# Altium PCB cameraTri-v1_1.PcbDoc
Units mil, origin at the board's own origin, x right, y up, seen from the top; angles counter-clockwise.
Board outline 1540 x 1715 mil, 2 copper layers (Top Layer, Bottom Layer); 49 components, 43 nets, 202 pads, 26 vias.
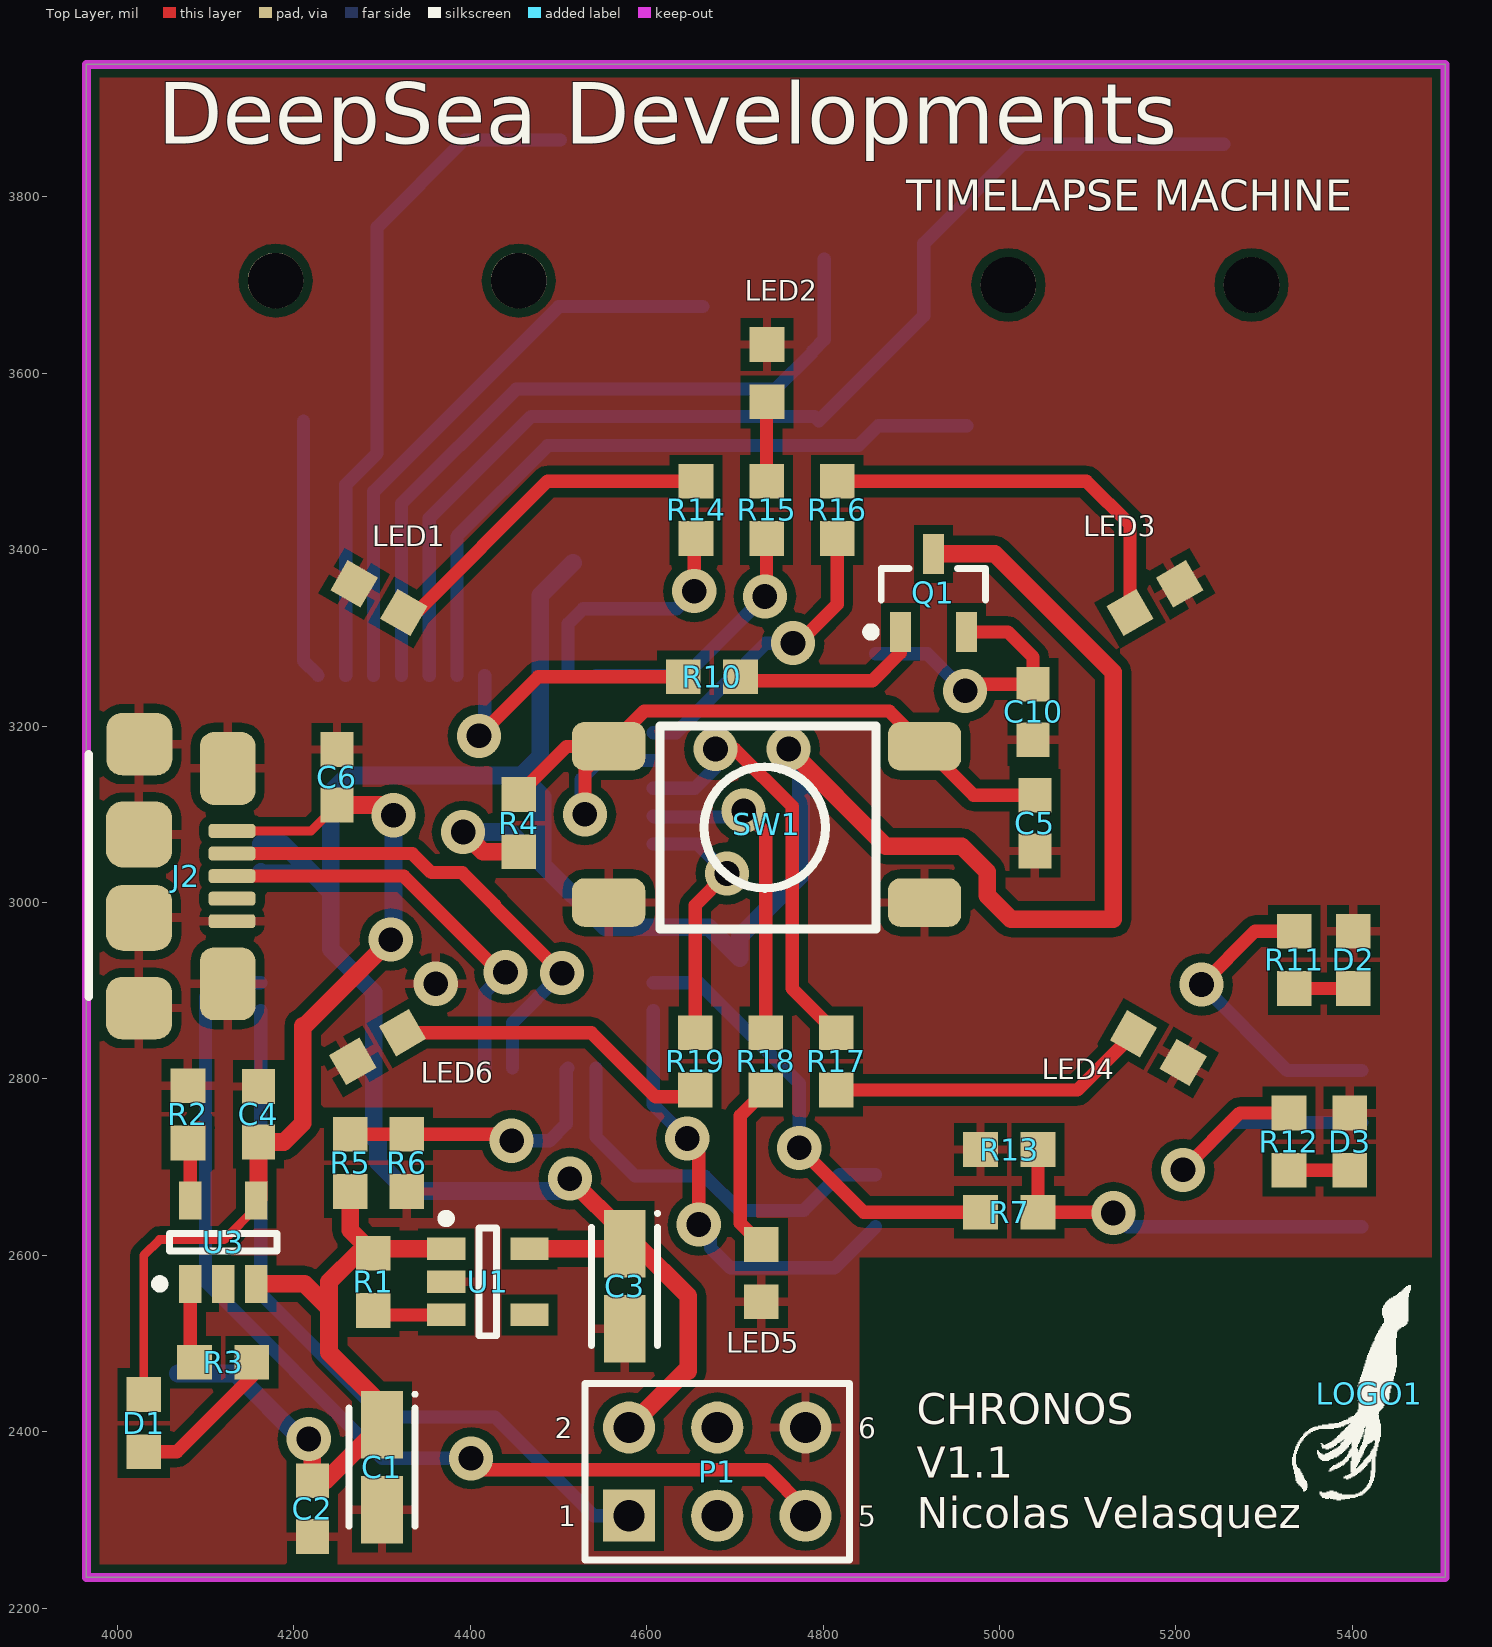
[diagram p0: Top Layer view]
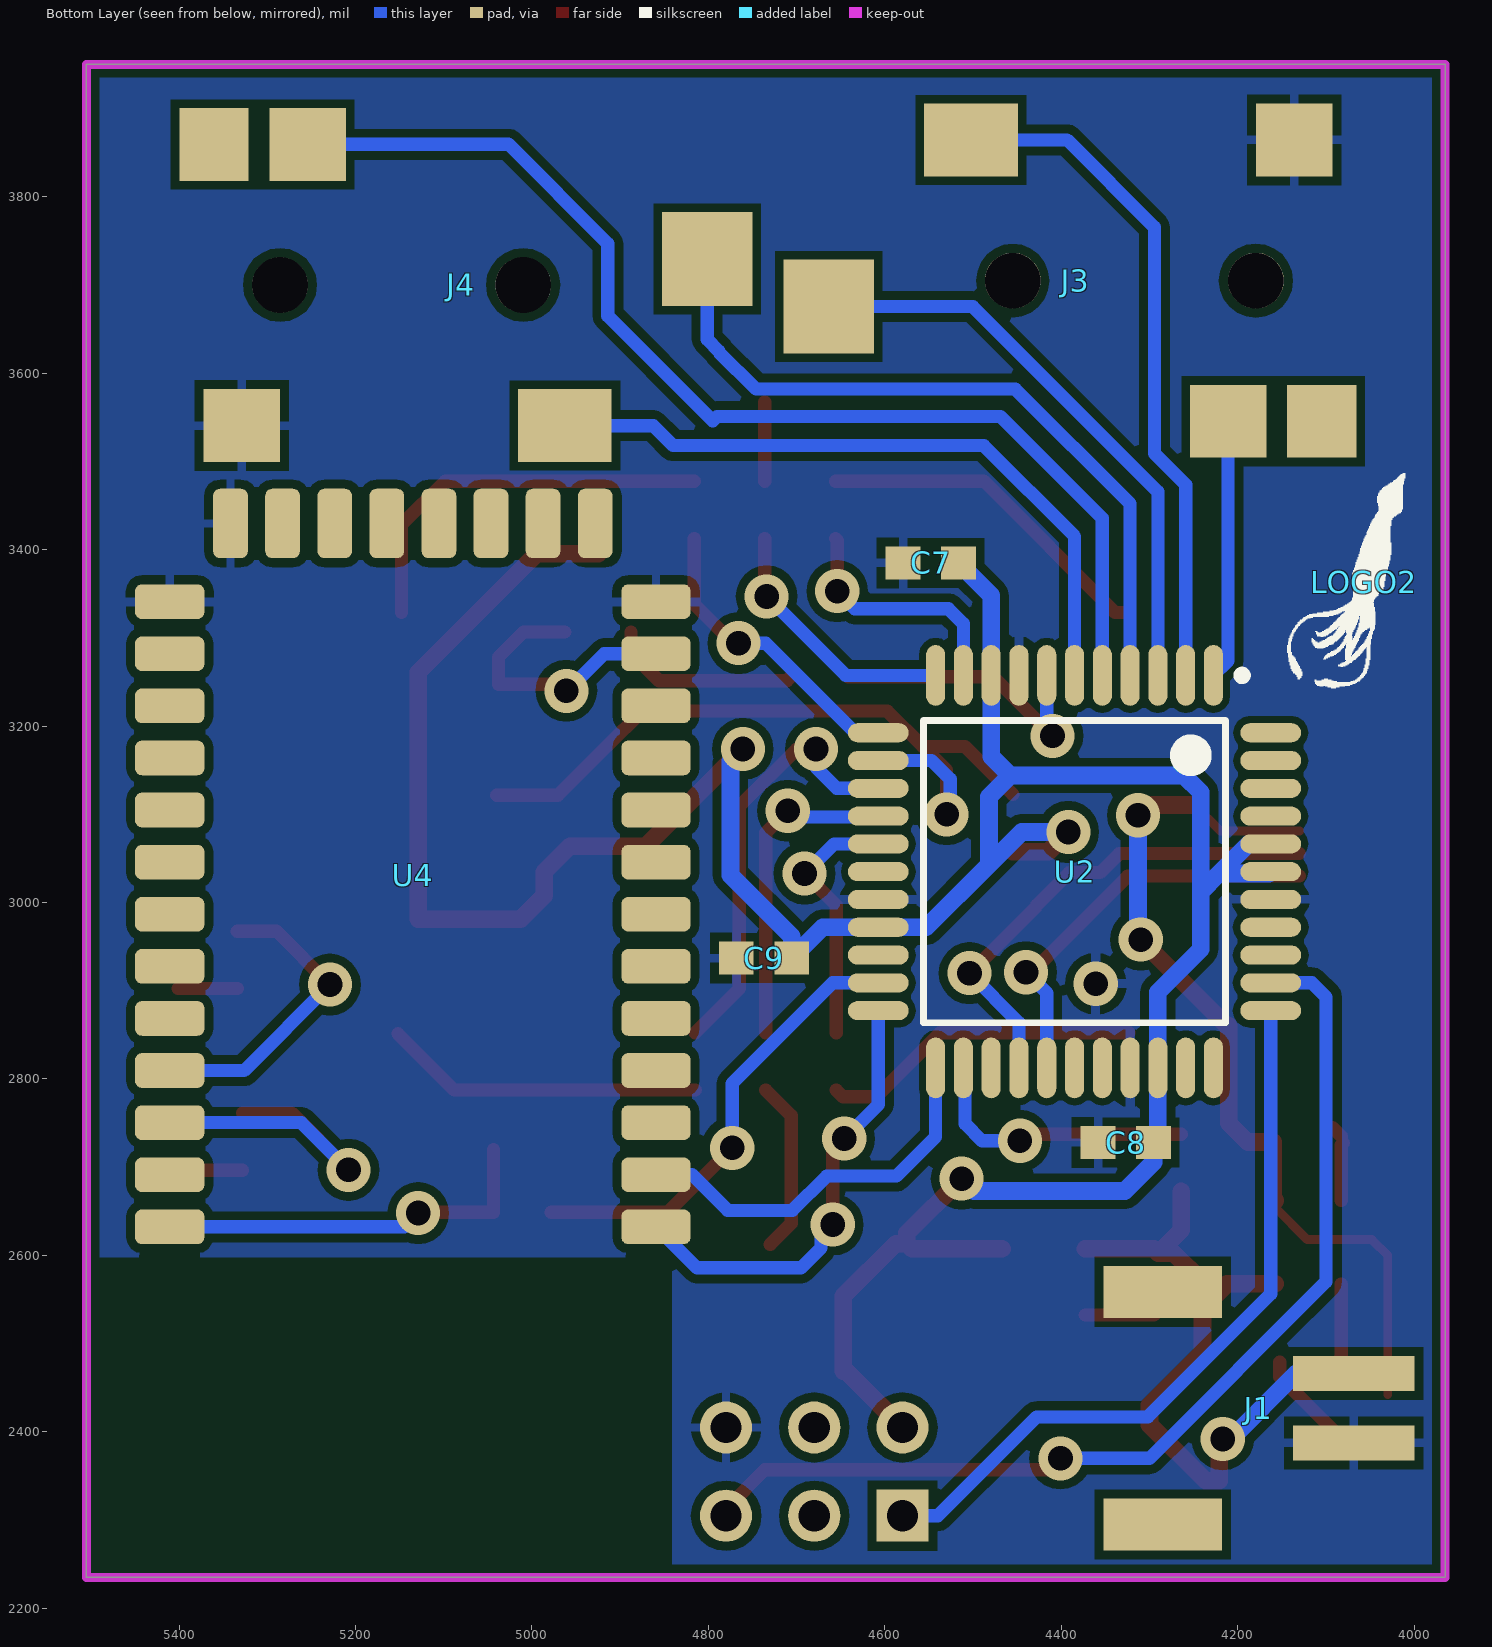
[diagram p1: Bottom Layer view, seen from below]

## Layer stack, top to bottom
Top Layer: signal copper 1.4
Dielectric: dielectric 12.6, FR-4, Dk 4.8
Bottom Layer: signal copper 1.4

## Board outline
3965,2235 3965,3950 5505,3950 5505,2235

## Design rules (kind name [scope] priority, off if disabled: settings)
Clearance Clearance_fine_pitch [HasFootprint('44A_N')] p1: gap=8
Clearance Clearance_1 [All] p2: gap=10
PolygonConnect [All] p1: connectstyle=Relief reliefconductorwidth=10 reliefentries=4 polygonreliefangle="90 Angle" airgapwidth=10
RoutingVias [All] p1: holewidth=28 width=50 viastyle="Through Hole" minholewidth=28 minwidth=50 maxholewidth=28 maxwidth=50
SolderMaskExpansion [All] p1: expansion=4
Width Power [(InNet('3V3') OR InNet('GND') OR InNet('V_BAT') OR InNet('V_USB'))] p1: maxlimit=20 minlimit=10 preferedwidth=20
Width [All] p2: maxlimit=15 minlimit=10 preferedwidth=15
28 further rules are at their usual default settings.

## Components (designator, comment, footprint, x,y, rotation, side; value= is the part's Value field where it differs from the comment)
C1 "10uF" C_TANT_A_3216_N 4300,2360 r270 top
C2 "0.1uF" C0603_N 4221,2313 r90 top
C3 "10uF" C_TANT_A_3216_N 4575,2565 r270 top
C4 "0.1uF" C0603_N 4160,2760 r270 top
C5 "0.1uF" C0603_N 5040,3090 r270 top
C6 "0.1uF" C0603_N 4249,3142 r270 top
C7 "0.1uF" C0603_N 4548,3385 r180 bottom
C8 "0.1uF" C0603_N 4327,2728 r180 bottom
C9 "0.1uF" C0603_N 4737,2937 r180 bottom
C10 "0.1uF" C0603_N 5038,3216 r90 top
D1 "Green" R0603_N 4030,2410 r270 top
D2 "Green" R0603_N 5401,2935 r90 top
D3 "Green" R0603_N 5397,2729 r90 top
J1 "JST-PH-2PINS" JST-PH-2 4285,2295 r90 bottom
J2 "MICRO_USB" USB_MICRO_SMD 4130,3030 r270 top
J3 "CONN_3.5mm" JACK_3.5MM 4455,3705 r0 bottom
J4 "CONN_3.5mm" JACK_3.5MM 5010,3700 r180 bottom
LED1 "Green" R0603_N 4296.63,3345 r150 top (schematic designator D4)
LED2 "Green" R0603_N 4736.36,3600 r90 top (schematic designator D5)
LED3 "Green" R0603_N 5176.09,3345 r30 top (schematic designator D6)
LED4 "Green" R0603_N 5180,2835 r330 top (schematic designator D7)
LED5 "Green" R0603_N 4730,2580 r270 top (schematic designator D8)
LED6 "Green" R0603_N 4295,2836.3 r210 top (schematic designator D9)
LOGO1 "Logo_DeepSea" DeepSea_logo1 5419,2443 r0 top
LOGO2 "Logo_DeepSea" DeepSea_logo1 4057,3363 r180 bottom (schematic designator LOGO1)
P1 "Header 3X2" HDR2X3 4580,2305 r0 top
Q1 "BSS84" SOT-23_N 4925,3351 r90 top
R1 "10K" R0603_N 4290,2570 r90 top
R2 "10K" R0603_N 4080,2760 r270 top
R3 "1K" R0603_N 4120,2479 r180 top
R4 "10K" R0603_N 4455,3090 r270 top
R5 "1M" R0603_N 4264,2705 r90 top
R6 "1M" R0603_N 4328,2705 r270 top
R7 "1K" R0603_N 5011,2649 r0 top
R10 "1K" R0603_N 4674,3256 r180 top
R11 "1K" R0603_N 5334,2935 r270 top
R12 "1K" R0603_N 5328,2729 r270 top
R13 "10K" R0603_N 5011,2720 r180 top
R14 "1K" R0603_N 4656,3445 r90 top
R15 "1K" R0603_N 4736,3445 r90 top
R16 "1K" R0603_N 4816,3445 r90 top
R17 "1K" R0603_N 4815,2820 r270 top
R18 "1K" R0603_N 4735,2820 r270 top
R19 "1K" R0603_N 4655,2820 r270 top
SW1 "SWITCH" swich_foot 4915,3000 r180 top
U1 "AAT3221IGV-3.3-T1" SOT-23-OT5_N 4420,2570 r0 top
U2 "ATXMEGA32A4U-AU" 44A_N 4385,3035 r270 bottom
U3 "MCP73831T-2ACI/OT" SOT-23-OT5_N 4120,2615 r90 top
U4 "HC-05" HC-05 5135,3410 r0 bottom

## Footprints (in the part's own frame and the unit in brackets; to place one, negate y for a bottom-side part, rotate by r counter-clockwise, add the part's x,y. Pads: shape width x height; smd on the part's side, far side on the other; paste and mask are expansions set on the pad)
44A_N [mm] "Thin QFP, 44-Leads, Body 10x10mm, Pitch 0.8mm, IPC Medium Density"
  oval 1.75x0.55 smd: 1(-5.65,4) 2(-5.65,3.2) 3(-5.65,2.4) 4(-5.65,1.6) 5(-5.65,0.8) 6(-5.65,0) 7(-5.65,-0.8) 8(-5.65,-1.6) 9(-5.65,-2.4) 10(-5.65,-3.2) 11(-5.65,-4) 23(5.65,-4) 24(5.65,-3.2) 25(5.65,-2.4) 26(5.65,-1.6) 27(5.65,-0.8) 28(5.65,0) 29(5.65,0.8) 30(5.65,1.6) 31(5.65,2.4) 32(5.65,3.2) 33(5.65,4)
  oval 0.55x1.75 smd: 12(-4,-5.65) 13(-3.2,-5.65) 14(-2.4,-5.65) 15(-1.6,-5.65) 16(-0.8,-5.65) 17(0,-5.65) 18(0.8,-5.65) 19(1.6,-5.65) 20(2.4,-5.65) 21(3.2,-5.65) 22(4,-5.65) 34(4,5.65) 35(3.2,5.65) 36(2.4,5.65) 37(1.6,5.65) 38(0.8,5.65) 39(0,5.65) 40(-0.8,5.65) 41(-1.6,5.65) 42(-2.4,5.65) 43(-3.2,5.65) 44(-4,5.65)
  silkscreen extent -5.77,-4.35 4.35,4.95, body extent -5,-5 5,5, height 1.2
C0603_N [mm] "Chip Capacitor, 2-Leads, Body 1,60x0,80mm, IPC Medium Density"
  rect 1x0.95 smd: 1(-0.8,0) 2(0.8,0)
  body extent -0.88,-0.48 0.87,0.48, height 0.85
C_TANT_A_3216_N [mm] "Molded Capacitor, 2-Leads, Body 3,20x1,60mm, IPC Medium Density"
  rect 1.95x1.2 smd: 1(-1.225,0) 2(1.225,0)
  silkscreen extent -2.15,-0.95 1.7,1, body extent -1.7,-0.9 1.7,0.9, height 1.8
DeepSea_logo1 [mil]
  silkscreen extent -87,-120 47,123
HC-05 [mm]
  rrect40% 2x1 smd: 1(-7,19.75) 2(-7,18.25) 3(-7,16.75) 4(-7,15.25) 5(-7,13.75) 6(-7,12.25) 7(-7,10.75) 8(-7,9.25) 9(-7,7.75) 10(-7,6.25) 11(-7,4.75) 12(-7,3.25) 13(-7,1.75) 22(7,1.75) 23(7,3.25) 24(7,4.75) 25(7,6.25) 26(7,7.75) 27(7,9.25) 28(7,10.75) 29(7,12.25) 30(7,13.75) 31(7,15.25) 32(7,16.75) 33(7,18.25) 34(7,19.75)
  rrect40% 1x2 smd: 14(-5.25,-0.5) 15(-3.75,-0.5) 16(-2.25,-0.5) 17(-0.75,-0.5) 18(0.75,-0.5) 19(2.25,-0.5) 20(3.75,-0.5) 21(5.25,-0.5)
  body extent -6.43,-0.05 6.58,26.85, height 2.4
HDR2X3 [mm] "Connector; Header; 3x2 Position"
  rect 1.5x1.5 hole 0.9: 1(0,0)
  round 1.5 hole 0.9: 2(0,2.54) 3(2.54,0) 4(2.54,2.54) 5(5.08,0) 6(5.08,2.54)
  silkscreen extent -1.27,-1.27 6.35,3.81
JACK_3.5MM [mm]
  rect 2.2x2.1 smd: 1(-8.1,-4.05) 2(-6.2,4.05)
  rect 2.7x2.1 smd: 3(1.2,-4.05)
  rect 2x2.1 smd: 4(-8.9,4.05)
  rect 2.6x2.7 smd: 5(5.3,0.75)
  round 1.6 hole 1.6: ""(-7,0) ""(0,0)
  body extent -13,-3 4,2.95, height 5
JST-PH-2 [mm]
  rect 1x3.5 smd: 1(2.35,-5.5) 2(4.35,-5.5)
  rect 1.5x3.4 smd: ""(0,0) ""(6.7,0)
  body extent 0.4,-7.15 6.3,0.45, height 4.8
R0603_N [mm] "Chip Resistor, 2-Leads, Body 1,60x0,85mm, IPC Medium Density"
  rect 1x1 smd: 1(-0.825,0) 2(0.825,0)
  body extent -0.87,-0.48 0.87,0.47, height 0.45
SOT-23-OT5_N [mm] "SOT23, 5-Leads, Body 2.9x1.6mm, Pitch 0.95mm, Lead Span 2.7mm, IPC Medium Density"
  rect 1.1x0.65 smd: 1(-1.2,0.95) 2(-1.2,0) 3(-1.2,-0.95) 4(1.2,-0.95) 5(1.2,0.95)
  silkscreen extent -1.32,-1.55 0.25,1.95, body extent -0.9,-1.55 0.9,1.55, height 1.45
SOT-23_N [mm] "SOT23, 3-Leads, Body 2.9x1.3mm, Pitch 0.95mm, Lead Span 2.5mm, IPC Medium Density"
  rect 1.15x0.6 smd: 1(-1.125,0.95) 2(-1.125,-0.95) 3(1.125,0)
  silkscreen extent -1.25,-1.5 0.7,1.92, body extent -0.7,-1.5 0.7,1.5, height 1.1
swich_foot [mil]
  rrect50% 83x55 smd: 1(0,0) 1(358,0) 2(0,-177) 2(358,-177)
  silkscreen extent 55,-200 300,30, body extent 57,-201 300,29, height 138
USB_MICRO_SMD [mm]
  rrect50% 0.4x1.35 smd: 1(-1.3,0) 2(-0.65,0) 3(0,0) 4(0.65,0) 5(1.3,0)
  rrect50% 1.8x1.9 smd: shd(-3.8,-2.67) shd(3.8,-2.675)
  rrect50% 2.1x1.6 smd: shd(-3.1,-0.125) shd(3.1,-0.125)
  rrect50% 1.9x1.9 smd: shd(-1.2,-2.675) shd(1.2,-2.675)
  silkscreen extent -3.5,-4.13 3.47,-4.13, body extent -3.96,-5.1 4.01,0.33, height 2.68

## Part data
C1 C3: library part CP_SMD
C2 C4 C5 C6 C7 C8 C9 C10: library part C_SMD
D1 D2 D3 LED1 LED2 LED3 LED4 LED5 LED6: library part LED_SMD
J1: "CONN HEADER PH SIDE 2POS 2MM SMD"
J2: "CONN USB MICRO B RECPT SMT R/A"
J3 J4: "CONN JACK STEREO 3.5MM SMD"
P1: "Header, 3-Pin, Dual row"
Q1: "MOSFET P-CH 50V 130MA SOT-23"
R1 R2 R3 R4 R5 R6 R7 R10 R11 R12 R13 R14 R15 R16 R17 R18 R19: library part R_SMD
SW1: "SWITCH TACTILE SPST-NO 0.05A 12V"
U1: "IC REG LDO 3.3V 0.15A SOT23-5"
U2: "IC MCU 8BIT 32KB FLASH 44TQFP"
U3: "IC CONTROLLR LI-ION 4.2V SOT23-5"
U4: "Bluetooth RS232 module"

## Via types
v1: diameter 50, hole 28, Top Layer to Bottom Layer, 26 vias

## Nets (pads, with @x,y where several pads share a name; then routed paths per layer and width w, separated by ;. In a path a pad name is that pad's centre, name@x,y a point inside that pad or via, vN(x,y) a via of type N, cw(c..) or ccw(c..) an arc to the next point about the centre after c; other vN are vias at no path point)
3V3: C3.1 C7.2 C8.2 C9.2 P1.2 Q1.3 R4.2 U1.5 U2.9 U2.19 U2.31 U2.39 U2.40 | length 3644.4
  Top Layer w20: v1(4392,3080) 4414.48,3057.52 R4.2 ; U1.5 4569.17,2607.4 C3.1 ; v1(4513,2687) 4575,2625 C3.1 ; P1.2 4644,2469 4647,2469 4647,2554 4587.77,2613.23 C3.1 ; v1(4761,3174) 4871,3064 4957,3064 4986,3035 4986,3008 5013,2981 5129,2981 5129,3261 4994.71,3395.29 Q1.3
  Bottom Layer w20: U2.39 4164.56,3033 4221,3033 ; U2.40 4187.5,3066.5 4221,3033 ; v1(4392,3080) 4445,3080 4482,3043 ; v1(4513,2687) 4499,2673 4328,2673 4295.5,2705.5 C8.2 4290.51,2732.99 U2.31 4290.51,2898.49 4242,2947 4242,3012 ; C7.2 4479.49,3347.98 U2.9 4479.49,3165.49 4458,3144 ; v1(4761,3174) 4775,3160 4775,3031 4705.5,2961.5 C9.2 4670.5,2972.01 U2.19 4552.99,2972.01 4482,3043 ; 4221,3033 4242,3012 ; 4242,3012 4242,3125 4261,3144 4458,3144 ; 4458,3144 4482,3120 4482,3043
BAT_CHK: R5.2 R6.1 U2.24 | length 320.3
  Top Layer w15: R5.2 R6.1 4439.52,2737.48 v1(4447,2730)
  Bottom Layer w15: v1(4447,2730) 4490,2730 4509,2749 4509,2810.57 U2.24
BT_KEY: R7.1 U2.21 | length 521.5
  Top Layer w15: v1(4773,2722) 4846,2649 R7.1
  Bottom Layer w15: U2.21 4658.98,2909.02 4773,2795 v1(4773,2722)
BT_RST: R10.2 U2.7 | length 330.4
  Top Layer w15: v1(4410,3189) 4477,3256 R10.2
  Bottom Layer w15: v1(4410,3189) 4416.5,3195.5 U2.7
BT_RX: U2.22 U4.1 | length 507.9
  Top Layer w15: v1@4646,2729 4659,2716 v1(4659,2635)
  Bottom Layer w15: U2.22 4607.44,2771.06 v1(4646,2732.5) ; v1(4659,2635) 4672.32,2621.68 4672.32,2608.68 4695,2586 4812.97,2586 U4.1
BT_TX: U2.23 U4.2 | length 446.3
  Bottom Layer w15: U2.23 4542.48,2734.52 4587,2690 4666,2690 4705,2651 4778,2651 4818.5,2691.5 U4.2
DETECT: J3.3 U2.2 | length 771.5
  Bottom Layer w15: U2.2 4259.02,3473.52 4294.5,3509 4294.5,3765.5 4393.45,3864.45 J3.3
DETECT_AUX: J4.3 U2.6 | length 787.3
  Bottom Layer w15: U2.6 4385,3415 4488,3518 4840,3518 4862.55,3540.55 J4.3
FOCUS: J3.5 U2.3 | length 668.2
  Bottom Layer w15: U2.3 4290.51,3465.51 4500.47,3675.47 J3.5
FOCUS_AUX: J4.5 U2.4 | length 842.9
  Bottom Layer w15: U2.4 4322.01,3452.01 4452,3582 4746,3582 4788,3624 4788,3625 4801.34,3638.34 J4.5
GND: C1.2 C2.1 C3.2 C4.1 C5.2 C6.1 C7.1 C8.1 C9.1 C10.1 D2.2 D3.2 J1.1 J2.5 J2.shd J3.1 J4.1 LED1.2 LED2.2 LED3.2 LED4.2 LED5.2 LED6.2 P1.6 R2.1 R6.2 R13.2 SW1.1 U1.2 U2.8 U2.18 U2.30 U2.38 U3.2 U4.13 U4.21 U4.22 | length 4.4
  Top Layer w20: v1@4357,2907 4360,2907 v1(4361,2908)
LED1: R14.1 U2.10 | length 277.2
  Top Layer w15: v1(4654,3353) 4654,3410.52 R14.1
  Bottom Layer w15: U2.10 4510.98,3315.98 4528,3333 4634,3333 v1(4654,3353)
LED2: R15.1 U2.11 | length 295
  Top Layer w15: v1(4734,3347) 4736,3349 R15.1
  Bottom Layer w15: U2.11 4644.44,3257.44 v1(4734,3347)
LED3: R16.1 U2.12 | length 337.2
  Top Layer w15: v1@4772,3294 4816,3338 R16.1
  Bottom Layer w15: U2.12 4633.48,3192.48 4735,3294 v1(4765.85,3294)
LED4: R17.1 U2.14 | length 492.5
  Top Layer w15: v1(4678,3174) 4700.1,3174 4765,3109.1 4765,2902.48 R17.1
  Bottom Layer w15: U2.14 4654.49,3129.49 4678,3153 v1(4678,3174)
LED5: R18.1 U2.15 | length 367.7
  Top Layer w15: v1(4710,3104) 4735,3079 R18.1
  Bottom Layer w15: U2.15 4608.43,3097 4703,3097 v1(4710,3104)
LED6: R19.1 U2.16 | length 292.9
  Top Layer w15: R19.1 4655,2997 v1(4691,3033)
  Bottom Layer w15: U2.16 4657.5,3066.5 v1(4691,3033)
MAIN_BUTTON: C5.1 R4.1 SW1.2 U2.13 | length 883.7
  Top Layer w15: R4.1 4509.52,3177 SW1.2@4557,3177 ; v1(4530,3100) 4530,3150 SW1.2@4557,3177 ; C5.1 4970.5,3121.5 4915,3177 4875,3217 4597,3217 SW1.2@4557,3177
  Bottom Layer w15: v1(4530,3100) 4526,3104 4526,3140 4546.98,3160.98 U2.13
NetC10_2: C10.2 Q1.2 U4.12 | length 317.1
  Top Layer w15: v1(4961,3240) 4968.5,3247.5 C10.2 5038,3278 5009.29,3306.71 Q1.2
  Bottom Layer w15: U4.12 4917.95,3282.05 4960,3240 v1(4961,3240)
NetD1_2: D1.2 R3.1 | length 174.2
  Top Layer w15: D1.2 4067.52,2377.52 4152.48,2462.48 R3.1
NetD2_1: D2.1 R11.2 | length 67
  Top Layer w15: R11.2 D2.1
NetD3_1: D3.1 R12.2 | length 69
  Top Layer w15: R12.2 D3.1
NetD4_1: LED1.1 R14.2 | length 392.8
  Top Layer w15: LED1.1 4338.76,3328.76 4487.48,3477.48 R14.2
NetD5_1: LED2.1 R15.2 | length 90.2
  Top Layer w15: R15.2 4736,3567.16 LED2.1
NetD6_1: LED3.1 R16.2 | length 451.7
  Top Layer w15: R16.2 5098.52,3477.48 5147.96,3428.04 LED3.1
NetD7_1: LED4.1 R17.2 | length 363.3
  Top Layer w15: R17.2 5088.15,2787.52 LED4.1
NetD8_1: LED5.1 R18.2 | length 197
  Top Layer w15: LED5.1 4706,2636.48 4706,2758.52 R18.2
NetD9_1: LED6.1 R19.2 | length 365
  Top Layer w15: LED6.1 4537.46,2852.54 4610,2780 4647.48,2780 R19.2
NetQ1_1: Q1.1 R10.1 | length 219.7
  Top Layer w15: R10.1 4710.98,3251.5 4856,3251.5 4887.6,3283.1 Q1.1
NetR1_1: R1.1 U1.3 | length 84.8
  Top Layer w15: R1.1 4294.92,2532.6 U1.3
NetR2_2: R2.2 U3.5 | length 80.4
  Top Layer w15: R2.2 4082.6,2724.92 U3.5 ; R2.2@4082.6,2735.08 R2.2@4092.52,2745
NetR3_2: R3.2 U3.1 | length 90.8
  Top Layer w15: U3.1 4082.6,2483.92 R3.2
NetR7_2: R7.2 R13.1 U4.34 | length 445
  Top Layer w15: R13.1 R7.2 5128,2649 v1(5129,2648)
  Bottom Layer w15: v1(5129,2648) 5144.56,2632.44 U4.34
NetR11_1: R11.1 U4.31 | length 352
  Top Layer w15: v1(5229,2907) 5289.48,2967.48 R11.1
  Bottom Layer w15: v1(5229,2907) 5326.39,2809.61 U4.31
NetR12_1: R12.1 U4.32 | length 371.5
  Top Layer w15: v1(5208,2697) 5272.48,2761.48 R12.1
  Bottom Layer w15: v1(5208,2697) 5261.55,2750.55 U4.32
PDI_CLK: P1.5 U2.35 | length 1186.6
  Top Layer w15: v1(4401,2370) 4414,2357 4736,2357 4780,2313 P1.5
  Bottom Layer w15: U2.35 4116.02,2909.02 4100,2893 4100,2570 4300,2370 v1(4401,2370)
PDI_DATA: P1.1 U2.34 | length 842.7
  Bottom Layer w15: U2.34 4162.56,2556.44 4302,2417 4428,2417 4540,2305 P1.1
SHUTTER: J3.2 U2.1 | length 295
  Bottom Layer w15: J3.2 4210.91,3274.05 U2.1
SHUTTER_AUX: J4.2 U2.5 | length 1306.4
  Bottom Layer w15: U2.5 4353.5,3435.5 4469,3551 4790,3551 4795,3546 4914,3665 4914,3747 5026.45,3859.45 J4.2
USB_DM: J2.2 U2.26 | length 562.4
  Top Layer w15: J2.2 4334.41,3055.59 4356,3034 4391,3034 4428,2997 4428,2996 v1(4504,2920) v1@4504,2921
  Bottom Layer w15: U2.26 4447.99,2863.99 v1(4504,2920)
USB_DP: J2.3 U2.27 | length 473.3
  Top Layer w15: J2.3 4324.64,3030 4433.64,2921 v1(4440,2921)
  Bottom Layer w15: U2.27 4416.5,2897.5 v1(4440,2921)
V_BAT: C1.1 C2.2 J1.2 R1.2 R5.1 U1.1 U3.3 | length 843.6
  Top Layer w20: U3.3 4212.24,2567.76 4240,2540 ; v1(4217,2392) 4221,2388 C2.2 4236.27,2344.5 C1.1 4300,2430 4240,2490 4240,2540 ; R5.1 4264,2628.48 R1.2 ; U1.1 4294.92,2607.4 R1.2 ; 4240,2540 4240,2570 4272.48,2602.48 R1.2
  Bottom Layer w20: J1.2 4133.74,2466.26 4208,2392 v1(4217,2392)
V_USB: C4.2 C6.2 D1.1 J2.1 U3.4 | length 1034.3
  Top Layer w10: D1.1 4030,2600 4048,2618 4121,2618 4157.4,2654.4 U3.4 ; J2.1 4219.68,3081.18 C6.2
  Top Layer w20: U3.4 4160,2664.84 C4.2 4188.5,2728.5 4210,2750 4210,2860 4212,2860 v1(4310,2958) ; C6.2 4297.5,3110.5 4309,3099 v1(4313,3099)
  Bottom Layer w20: v1(4310,2958) 4313,2961 v1(4313,3099)
pads on no net: J1. J2.4 J3. J3.4 J4. J4.4 P1.3 P1.4 U1.4 U2.17 U2.20 U2.25 U2.28 U2.29 U2.32 U2.33 U2.36 U2.37 U2.41 U2.42 U2.43 U2.44 U4.3 U4.4 U4.5 U4.6 U4.7 U4.8 U4.9 U4.10 U4.11 U4.14 U4.15 U4.16 U4.17 U4.18 U4.19 U4.20 U4.23 U4.24 U4.25 U4.26 U4.27 U4.28 U4.29 U4.30 U4.33

## Polygon pours and split planes (outlines as drawn)
GND on Top Layer "Top Layer-No Net" (solid, remove dead copper, pour order 2): 3980,3935 5490,3935 5490,2598 4841,2598 4841,2250 3980,2250
GND on Bottom Layer "Top Layer-No Net" (solid, remove dead copper, pour order 4): 5490,3935 5490,2598 4841,2598 4841,2250 3980,2250 3980,3935

## Keep-outs
Keep-Out Layer:
  the board outline again, w10

## Silkscreen, mask and mechanical layers (free items; w line width, h text height)
Top Overlay:
  text "DeepSea Developments" at 4046,3837 h120
  text "TIMELAPSE MACHINE" at 4894,3772 h60
  text "CHRONOS" at 4906,2397 h60
  text "V1.1" at 4906,2336 h60
  text "Nicolas Velasquez" at 4906,2279 h60
Mechanical 1:
  circle w10: c4736.36,3090 r509.28
  lines w10: 4290.35,2833.62 5182.36,3348.62 ; 4290.35,3348.62 5182.36,2833.62 ; 4736.36,2576.12 4736.36,3606.12

## Text inside footprints (layer, text, board x,y; h text height)
P1: Top Overlay "1" at 4500,2285 h40; Top Overlay "2" at 4496,2385 h40; Top Overlay "5" at 4840,2285 h40; Top Overlay "6" at 4840,2385 h40